# EAGLE board esquem (EAGLE 7.1.0)
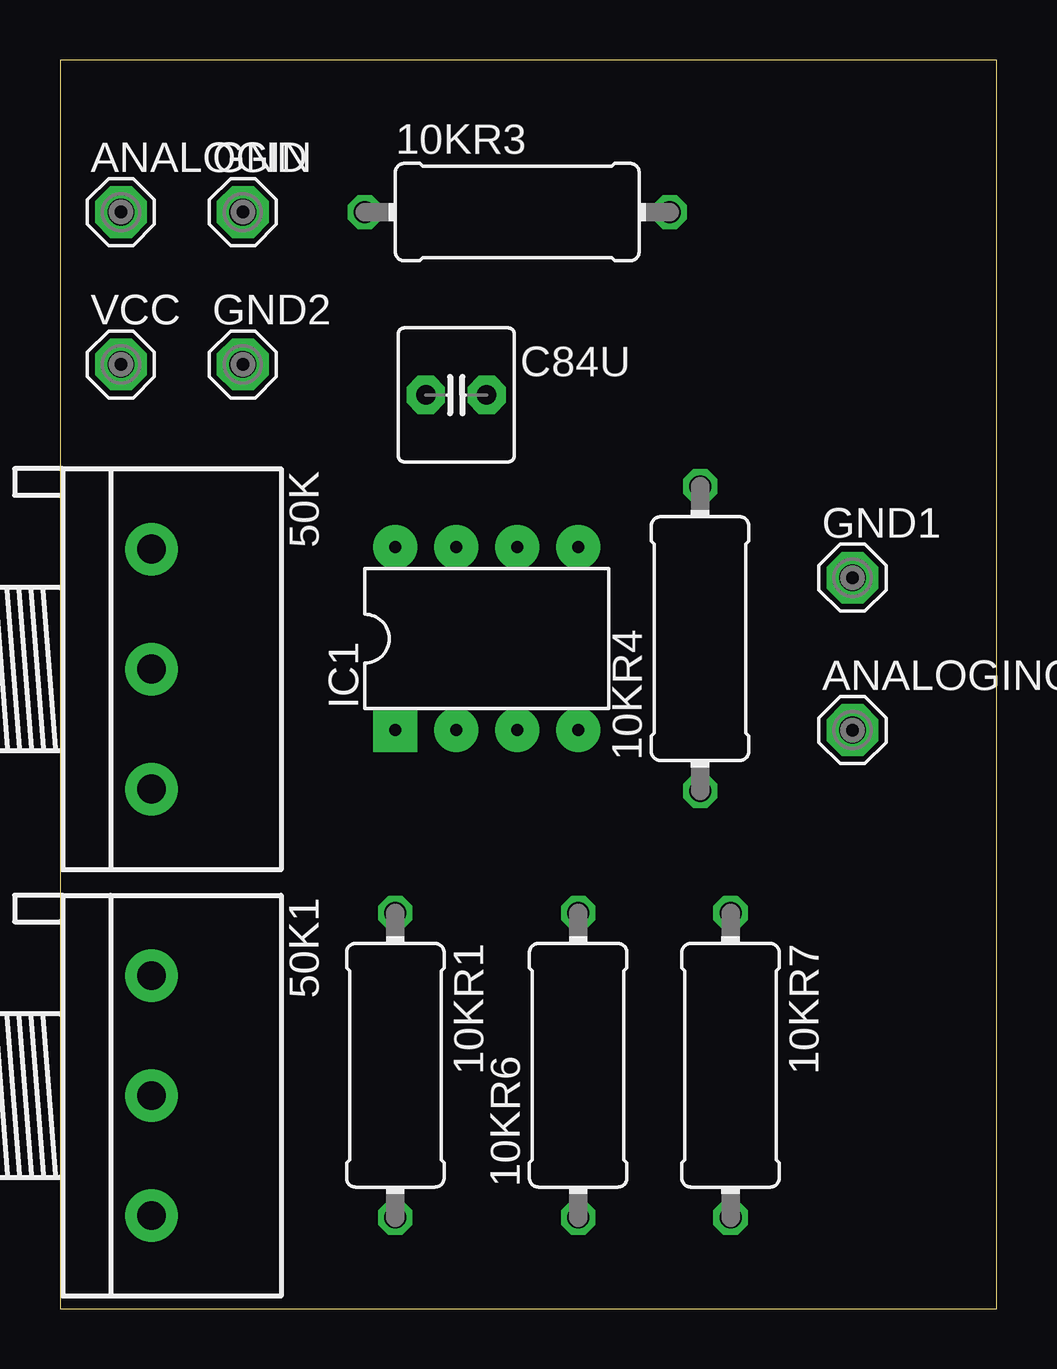
[diagram p0: board, top side]
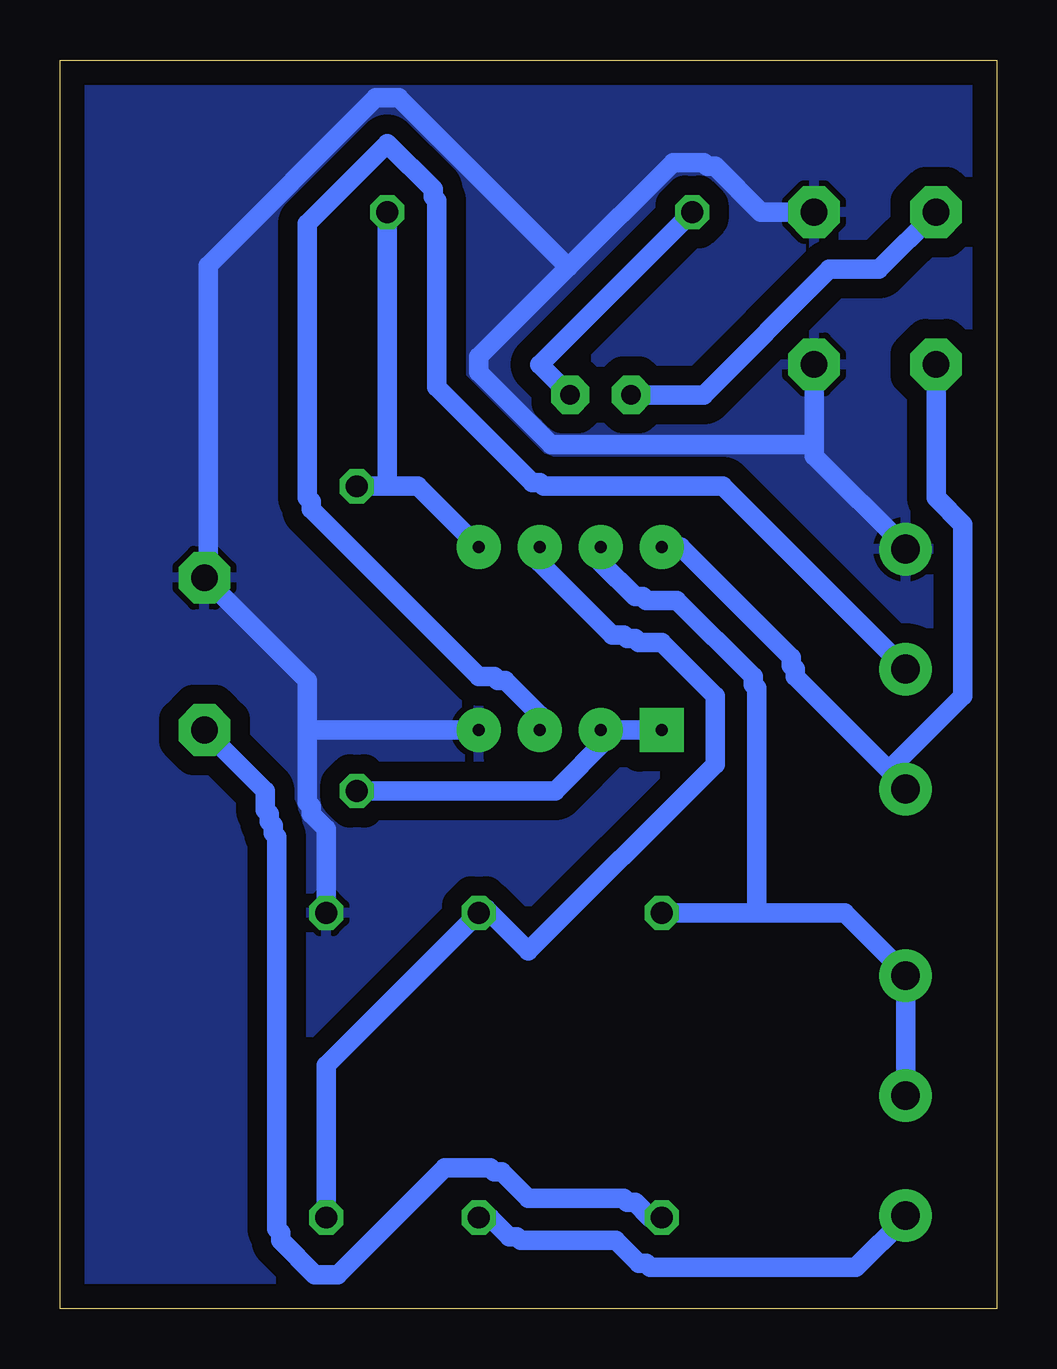
[diagram p1: board, bottom side, seen from below]

Size 39.04 x 52.06 mm. Coordinates in mm from the lower left corner, seen from the top.
Outline: 0,0 39.04,0 39.04,52.06 0,52.06 0,0
Copper layers (1*16): Top 0.035mm / dielectric 1.5mm / Bottom 0.035mm
Design rules "default *": minimum track width 32mil, minimum drill 24mil, track to track 32mil, track to pad 32mil, pad to pad 32mil, via to via 32mil, smd to smd 8mil, copper to edge 40mil, drill to drill 8mil, minimum pad ring 10mil, minimum via ring 8mil, stop-mask expansion 4mil, vias tented up to drill 0mil, thermal gap 10mil

## Footprints (pad centres in the part's own frame; a part is rotated, then mirrored left to right if it is on the bottom)
0411/12 = drill 0.914 octagon: 1 -6.35,0; 2 6.35,0
3RP/1610N = drill 1.2 pad 2.184: 1 -5,0; 2 0,0; 3 5,0
SE11 = drill 1.118 pad 2.159 octagon: MP 0,0
C2.5-6 = drill 0.813 pad 1.6 octagon: 1 -1.27,0; 2 1.27,0
DIL08 = drill 0.5 pad 1.829 square: 1 -3.81,-3.81 | drill 0.5 pad 1.829: 2 -1.27,-3.81; 3 1.27,-3.81; 4 3.81,-3.81; 5 3.81,3.81; 6 1.27,3.81; 7 -1.27,3.81; 8 -3.81,3.81

## Placement (x,y rotation side)
10KR1  [0411/12]  13.97,10.16 270 top
10KR3  [0411/12]  19.05,45.72 0 top
10KR4  [0411/12]  26.67,27.94 90 top
10KR6  [0411/12]  21.59,10.16 90 top
10KR7  [0411/12]  27.94,10.16 270 top
50K  [3RP/1610N]  3.81,26.67 270 top
50K1  [3RP/1610N]  3.81,8.89 270 top
ANALOGIN  SE11  [SE11]  2.54,45.72 0 top
ANALOGINOUT  SE11  [SE11]  33.02,24.13 0 top
C84U  [C2.5-6]  16.51,38.1 0 top
GND  SE11  [SE11]  7.62,45.72 0 top
GND1  SE11  [SE11]  33.02,30.48 0 top
GND2  SE11  [SE11]  7.62,39.37 0 top
IC1  LM358N  [DIL08]  17.78,27.94 0 top
VCC  SE11  [SE11]  2.54,39.37 0 top

## Library data of the parts
10KR1 10KR3 10KR4 10KR6 10KR7 = rcl
50K 50K1 = pot
ANALOGIN ANALOGINOUT GND GND1 GND2 VCC = solpad
C84U = capacitor-wima
IC1 = linear

## Nets
100KR1: 10KR1.1 50K1.1 50K1.2 IC1.7
GND: 10KR7.1 50K.1 GND1.MP GND2.MP GND.MP IC1.4
N$3: 50K.2 IC1.3
N$4: 10KR4.1 IC1.1 IC1.2
N$5: 10KR3.2 10KR4.2 IC1.5
N$6: 10KR3.1 C84U.2
N$7: ANALOGIN.MP C84U.1
N$8: 10KR6.2 10KR7.2 IC1.6
N$9: 10KR6.1 50K1.3
N$11: 10KR1.2 ANALOGINOUT.MP
VCC: 50K.3 IC1.8 VCC.MP

## Tracks (layer width: path | path; a pad name or v marks a point on that pad's centre or on a via)
100KR1
  Bottom 0.813: 10,16.51 6.35,16.51 3.81,13.97 50K1.1 50K1.2 | 10,16.51 10KR1.1 | IC1.7 16.51,31.11 15.08,29.69 14.76,29.69 14.61,29.53 13.34,29.53 10.16,26.35 10.16,26.04 10,25.88 10,16.51
GND
  Bottom 0.813: 10KR7.1 27.94,20 28.57,20.64 28.57,20.95 28.73,21.11 28.73,24.13 | 28.73,24.13 28.73,26.19 GND1.MP 32.86,30.8 32.86,43.5 25.88,50.48 24.92,50.48 17.86,43.42 | 28.73,24.13 IC1.4 | 7.62,36.04 7.62,35.56 3.81,31.75 50K.1 | 7.62,36.04 GND2.MP | GND.MP 9.84,45.72 11.75,47.62 12.06,47.62 12.22,47.78 13.49,47.78 17.86,43.42 | 17.86,43.42 21.59,39.69 21.59,39.05 18.57,36.04 7.62,36.04
  pour Bottom: 0,52.07 0,0 39.37,0 39.37,52.07
N$3
  Bottom 0.813: IC1.3 19.05,24.77 20.48,26.19 20.8,26.19 20.95,26.35 21.59,26.35 28.57,33.34 28.57,33.66 28.73,33.81 28.73,45.24 25.4,48.58 23.5,46.67 23.5,46.35 23.34,46.2 23.34,38.42 19.37,34.45 19.05,34.45 18.89,34.29 11.43,34.29 50K.2
N$4
  Bottom 0.813: 10KR4.1 18.41,21.59 16.19,23.81 IC1.2 IC1.1
N$5
  Bottom 0.813: 25.4,34.29 24.13,34.29 IC1.5 | 25.4,34.29 10KR4.2 | 25.4,34.29 10KR3.2
N$6
  Bottom 0.813: 10KR3.1 19.05,39.37 C84U.2
N$7
  Bottom 0.813: C84U.1 12.22,38.1 6.99,43.34 4.92,43.34 ANALOGIN.MP
N$8
  Bottom 0.813: 10KR7.2 27.94,10.16 10KR6.2 21.27,16.67 19.53,14.92 11.75,22.7 11.75,25.56 13.97,27.78 14.92,27.78 15.08,27.94 15.4,27.94 15.56,28.1 16.03,28.1 19.05,31.11 IC1.6
N$9
  Bottom 0.813: 10KR6.1 21.11,3.81 20.32,3.02 20,3.02 19.84,2.86 15.88,2.86 14.92,1.91 14.61,1.91 14.45,1.75 5.87,1.75 3.81,3.81 50K1.3
N$11
  Bottom 0.813: 10KR1.2 14.45,3.81 15.08,4.45 15.4,4.45 15.56,4.6 19.53,4.6 20.64,5.71 20.95,5.71 21.11,5.87 23.02,5.87 27.46,1.43 28.42,1.43 29.84,2.86 29.84,3.17 30,3.33 30,19.68 30.16,19.84 30.16,20.16 30.32,20.32 30.32,20.64 30.48,20.8 30.48,21.59 ANALOGINOUT.MP
VCC
  Bottom 0.813: IC1.8 13.18,31.75 8.57,27.15 8.57,26.83 8.41,26.67 8.41,26.35 3.81,21.75 50K.3 4.29,22.7 1.43,25.56 1.43,32.7 2.54,33.81 VCC.MP